# Altium PCB PC-104 16 bit bus.PCBDOC
Units mm, origin at the board's own origin, x right, y up, seen from the top; angles counter-clockwise.
Board outline 59.94 x 81.53 mm, 2 copper layers (TopLayer, BottomLayer); 58 components, 152 nets, 434 pads, 55 vias.
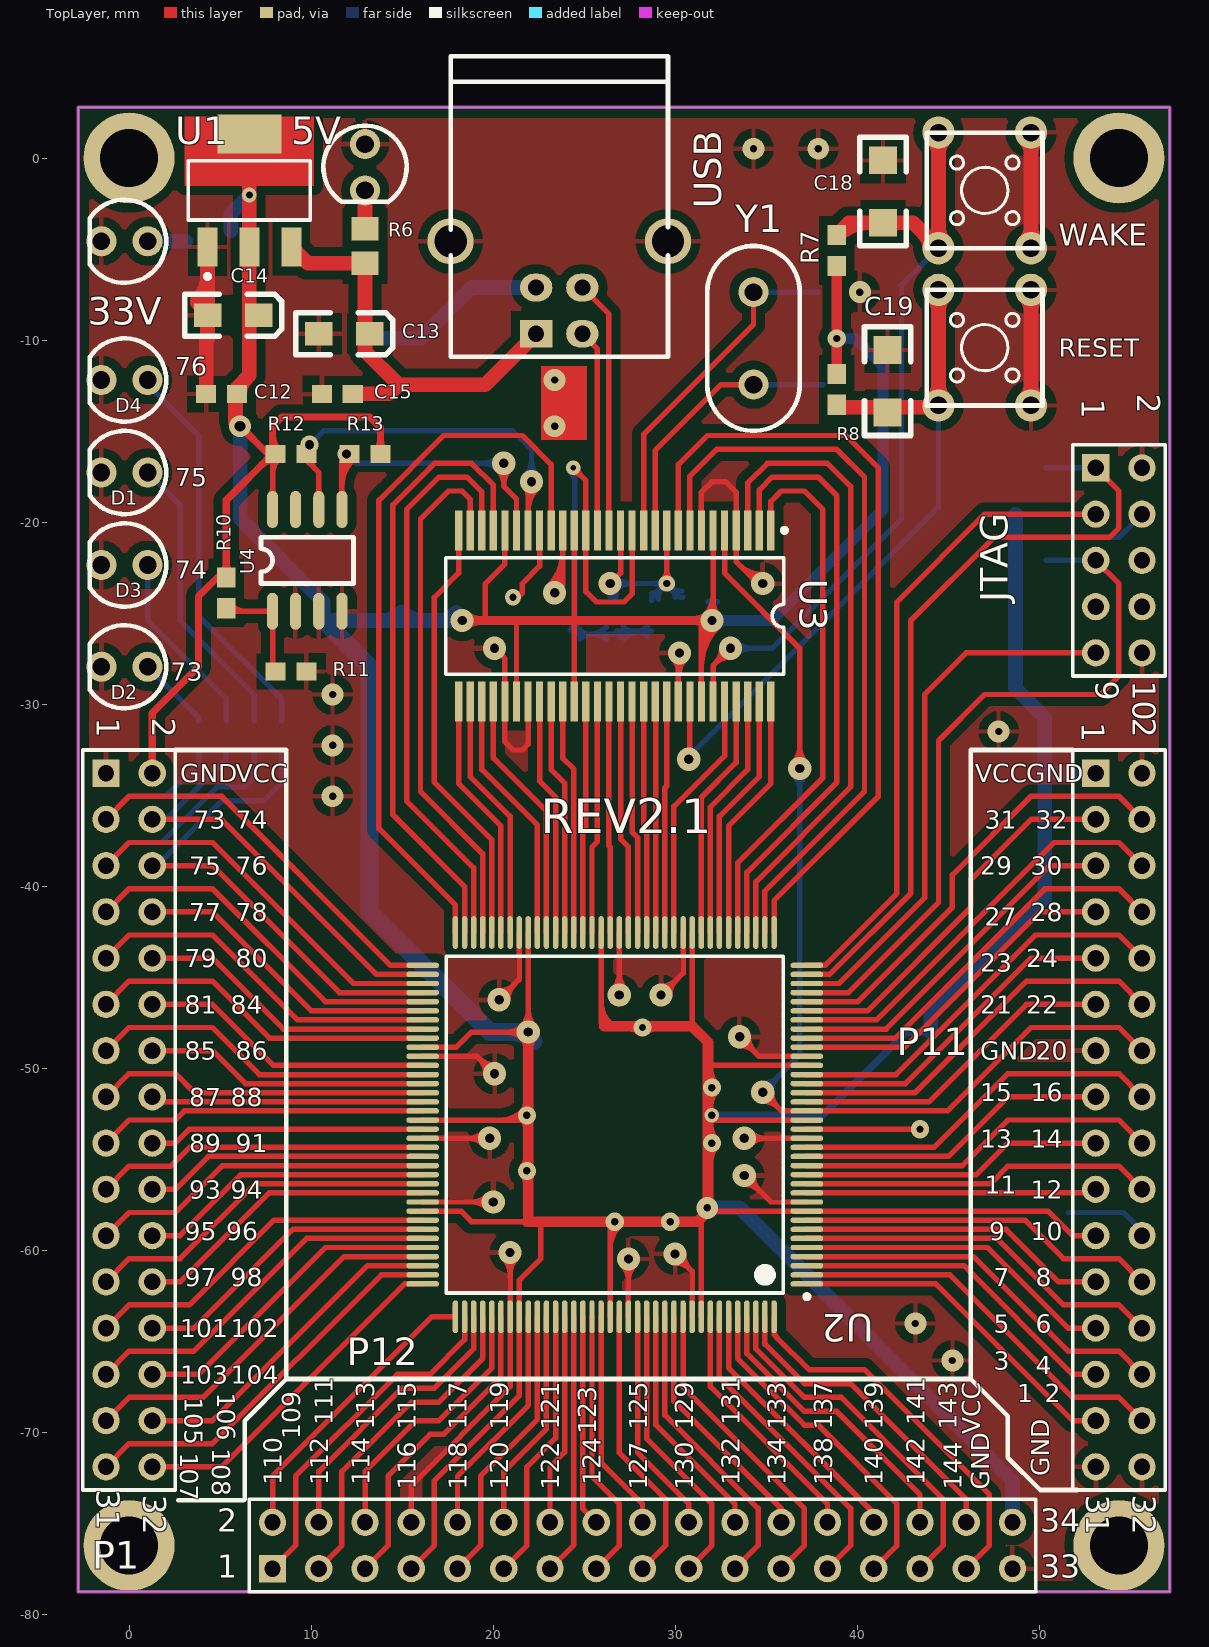
[diagram p0: TopLayer view]
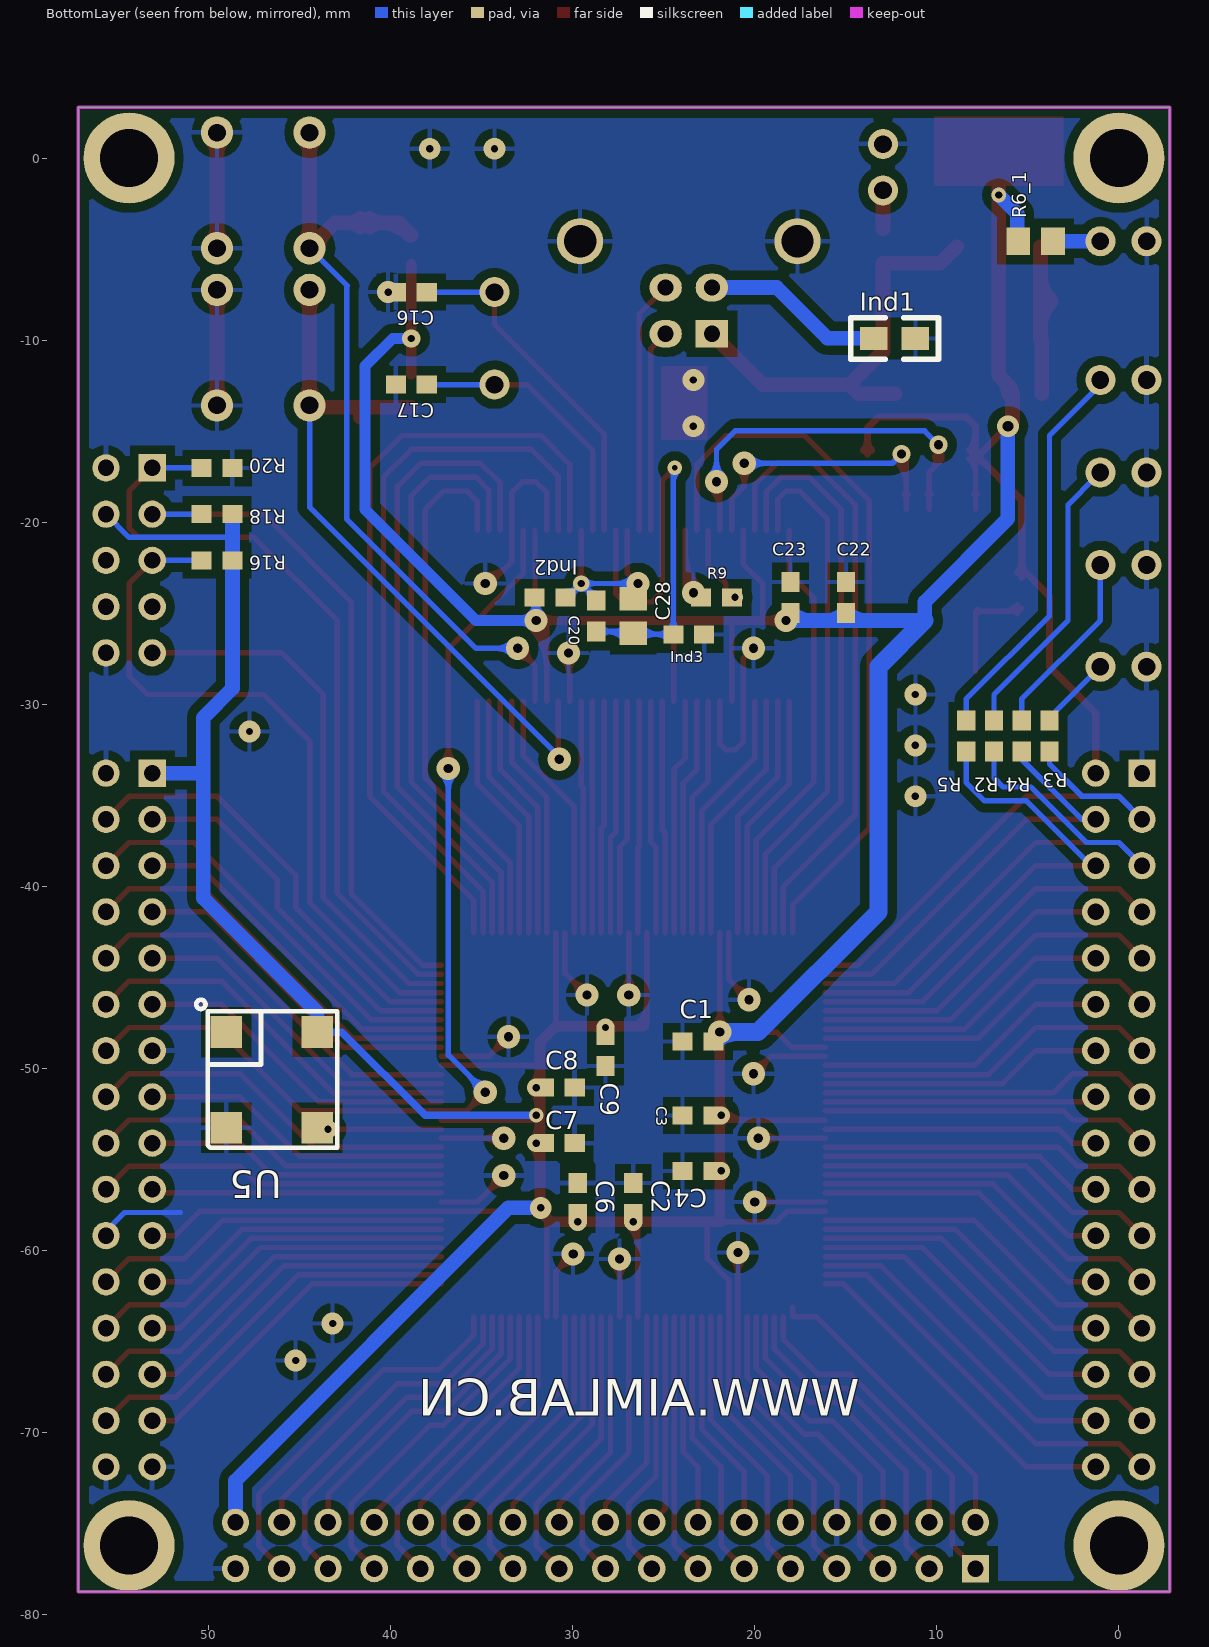
[diagram p1: BottomLayer view, seen from below]

## Layer stack, top to bottom
TopLayer: signal copper 0.0356
Dielectric: core 0.32, FR-4, Dk 4.8
BottomLayer: signal copper 0.0356

## Board outline
-2.794,-78.74 57.15,-78.74 57.15,2.794 -2.794,2.794

## Design rules (kind name [scope] priority, off if disabled: settings)
Clearance [All] p1: gap=0.2
ComponentClearance [All] p1: gap=0.254 collisioncheckmode=0 verticalgap=0.254
PlaneClearance [All] p1: clearance=0
PolygonConnect [All] p1: connectstyle=Relief reliefconductorwidth=0.254 reliefentries=4 polygonreliefangle="90 Angle"
RoutingVias [All] p1: holewidth=0.508 width=1.27 viastyle="Through Hole" minholewidth=0.711 minwidth=1.27 maxholewidth=4.711 maxwidth=7.27
SolderMaskExpansion [All] p1: expansion=0.102
TestPointUsage [All] p1: valid=0 allowmultiple=FALSE
Testpoint [All] p1: side=7 testpointundercomponent=TRUE minsize=1.016 maxsize=2.54 preferedsize=1.524 minholesize=0.508 maxholesize=1.016 preferedholesize=0.813 testpointgrid=0.025 style=1001 order=0-112345678
Width [All] p1: maxlimit=2.254 minlimit=0.2 preferedwidth=0.6
17 further rules are at their usual default settings.

## Components (designator, comment, footprint, x,y, rotation, side; value= is the part's Value field where it differs from the comment)
5V "LED" LED-3 12.954,0.762 r270 top (schematic designator D5)
33V "LED" LED-3 1.016,-4.572 r180 top (schematic designator D5)
C1 "0.1uF" 1608[0603] 23.114,-48.514 r180 bottom
C2 "0.1uF" 1608[0603] 26.67,-57.15 r270 bottom
C3 "Cap Semi" 1608[0603] 23.114,-52.578 r180 bottom
C4 "Cap Semi" 1608[0603] 23.114,-55.626 r180 bottom
C6 "Cap Semi" 1608[0603] 29.718,-57.15 r270 bottom
C7 "Cap Semi" 1608[0603] 30.734,-54.102 r0 bottom
C8 "Cap Semi" 1608[0603] 30.734,-51.054 r0 bottom
C9 "Cap Semi" 1608[0603] 28.194,-49.022 r90 bottom
C12 "0.1uF" 1608[0603] 5.08,-12.954 r180 top
C13 "22uF" 3216 13.208,-9.652 r0 top
C14 "22uF" 3216 7.112,-8.636 r0 top
C15 "0.1uF" 1608[0603] 11.43,-12.954 r180 top
C16 "Cap" 1608[0603] 38.862,-7.366 r0 bottom
C17 "Cap" 1608[0603] 38.862,-12.446 r0 bottom
C18 "0.1uF" 1206 41.402,-3.556 r90 top
C19 "0.1uF" 1206 41.656,-13.97 r90 top
C20 "0.1uF" 1608[0603] 28.702,-25.146 r270 bottom
C22 "Cap Semi" 1608[0603] 14.986,-24.13 r270 bottom
C23 "Cap Semi" 1608[0603] 18.034,-24.13 r270 bottom
C28 "10uF" 6-0805 26.67,-25.146 r270 bottom
D1 "LED" LED-3 1.016,-17.272 r180 top
D2 "LED" LED-3 1.016,-27.94 r180 top
D3 "LED" LED-3 1.016,-22.352 r180 top
D4 "LED" LED-3 1.016,-12.192 r180 top
Ind1 "10uh" 0805 13.462,-9.906 r180 bottom
Ind2 "10uH" 1608[0603] 31.242,-24.13 r180 bottom
Ind3 "10uH" 1608[0603] 23.622,-26.162 r0 bottom
JTAG "JTAG" HDR2X5 53.086,-17.018 r270 top (schematic designator P3)
P1 "Header 9X2" HDR2X16 -1.27,-33.782 r270 top
P11 "Header 6X2" HDR2X16 53.086,-33.782 r270 top
P12 "Header 6X2" HDR2X17 7.874,-77.47 r0 top (schematic designator P11)
R2 "Res1" 1608[0603] 6.858,-31.75 r270 bottom
R3 "Res1" 1608[0603] 3.81,-31.75 r270 bottom
R4 "Res1" 1608[0603] 5.334,-31.75 r270 bottom
R5 "Res1" 1608[0603] 8.382,-31.75 r270 bottom
R6 "4.7K" 2012[0805] 12.954,-4.826 r270 top
R6_1 "4.7K" 2012[0805] 4.572,-4.572 r180 bottom (schematic designator R6)
R7 "100K" 1608[0603] 38.862,-5.08 r270 top
R8 "100K" 1608[0603] 38.862,-12.7 r90 top
R9 "Res3" 1608[0603] 22.098,-24.13 r0 bottom
R10 "0" 1608[0603] 5.334,-23.876 r90 top
R11 "0" 1608[0603] 8.89,-28.194 r0 top
R12 "2K2" 1608[0603] 8.89,-16.256 r0 top
R13 "2K2" 1608[0603] 12.954,-16.256 r180 top
R16 "10K" 1608[0603] 49.53,-22.098 r180 bottom
R18 "10K" 1608[0603] 49.53,-19.558 r180 bottom
R20 "10k" 1608[0603] 49.53,-17.018 r0 bottom
RESET "SW-PB" SW-6-6 46.99,-10.414 r180 top (schematic designator S2)
U1 "ASM1117-3.3" SOT223 6.604,-1.778 r0 top
U2 "EPM1270T144C5N" TQFP144_N 26.67,-53.086 r180 top locked
U3 "CY7C68013A-56PVXC" O56 26.67,-25.146 r180 top locked
U4 "24LC64" SO-8 7.874,-24.892 r90 top
U5 "50MHZ" OSC_50MHZ 49.022,-48.006 r270 bottom
USB "USB_B" USB-SQUARE 22.352,-9.652 r90 top (schematic designator USB1)
WAKE "SW-PB" SW-6-6 46.99,-1.778 r180 top (schematic designator S1)
Y1 "24MHZ" XTAL 34.29,-9.906 r270 top

## Footprints (in the part's own frame and the unit in brackets; to place one, negate y for a bottom-side part, rotate by r counter-clockwise, add the part's x,y. Pads: shape width x height; smd on the part's side, far side on the other; paste and mask are expansions set on the pad)
6-0805 [mm] "Chip Resistor; Body 2.0 x 1.3 mm (LxW typ)"
  rect 1.3x1.5 smd: 1(-0.95,0) 2(0.95,0)
0805 [mil]
  rect 60x50 smd: 1(0,0) 2(90,0)
  silkscreen extent -50,-45 140,45
1206 [mil]
  rect 60x60 smd: 1(0,0) 2(135,0)
  silkscreen extent -50,-50 185,50
1608[0603] [mm] "Chip Capacitor; Body 1.6 x 0.8 mm (LxW typ)"
  rect 1.1x1 smd: 1(-0.85,0) 2(0.85,0)
2012[0805] [mm] "Chip Resistor; Body 2.0 x 1.3 mm (LxW typ)"
  rect 1.3x1.5 smd: 1(-0.95,0) 2(0.95,0)
3216 [mil]
  rect 60x50 smd: 1(0,0) 2(-110,0)
  silkscreen extent -160,-45 50,45
HDR2X5 [mm] "Connector; Header; 5x2 Position"
  rect 1.5x1.5 hole 0.9: 1(0,0)
  round 1.5 hole 0.9: 2(0,2.54) 3(2.54,0) 4(2.54,2.54) 5(5.08,0) 6(5.08,2.54) 7(7.62,0) 8(7.62,2.54) 9(10.16,0) 10(10.16,2.54)
  silkscreen extent -1.27,-1.27 11.43,3.81
HDR2X16 [mm] "Connector; Header; 16x2 Position"
  rect 1.5x1.5 hole 0.9: 1(0,0)
  round 1.5 hole 0.9: 2(0,2.54) 3(2.54,0) 4(2.54,2.54) 5(5.08,0) 6(5.08,2.54) 7(7.62,0) 8(7.62,2.54) 9(10.16,0) 10(10.16,2.54) 11(12.7,0) 12(12.7,2.54) 13(15.24,0) 14(15.24,2.54) 15(17.78,0) 16(17.78,2.54) 17(20.32,0) 18(20.32,2.54) 19(22.86,0) 20(22.86,2.54) 21(25.4,0) 22(25.4,2.54) 23(27.94,0) 24(27.94,2.54) 25(30.48,0) 26(30.48,2.54) 27(33.02,0) 28(33.02,2.54) 29(35.56,0) 30(35.56,2.54) 31(38.1,0) 32(38.1,2.54)
  silkscreen extent -1.27,-1.27 39.37,3.81
HDR2X17 [mm] "Connector; Header; 17x2 Position"
  rect 1.5x1.5 hole 0.9: 1(0,0)
  round 1.5 hole 0.9: 2(0,2.54) 3(2.54,0) 4(2.54,2.54) 5(5.08,0) 6(5.08,2.54) 7(7.62,0) 8(7.62,2.54) 9(10.16,0) 10(10.16,2.54) 11(12.7,0) 12(12.7,2.54) 13(15.24,0) 14(15.24,2.54) 15(17.78,0) 16(17.78,2.54) 17(20.32,0) 18(20.32,2.54) 19(22.86,0) 20(22.86,2.54) 21(25.4,0) 22(25.4,2.54) 23(27.94,0) 24(27.94,2.54) 25(30.48,0) 26(30.48,2.54) 27(33.02,0) 28(33.02,2.54) 29(35.56,0) 30(35.56,2.54) 31(38.1,0) 32(38.1,2.54) 33(40.64,0) 34(40.64,2.54)
  silkscreen extent -1.27,-1.27 41.91,3.81
LED-3 [mil]
  round 65 hole 38: 1(0,0) 2(100,0)
  silkscreen extent -40,-90 125,90
O56 [mm] "SSOP; 56 Leads; Body Width 7.5 mm; Pitch 0.635 mm"
  rect 0.4x2.2 smd: 1(-8.572,-4.7) 2(-7.938,-4.7) 3(-7.302,-4.7) 4(-6.667,-4.7) 5(-6.032,-4.7) 6(-5.397,-4.7) 7(-4.762,-4.7) 8(-4.127,-4.7) 9(-3.492,-4.7) 10(-2.857,-4.7) 11(-2.222,-4.7) 12(-1.587,-4.7) 13(-0.952,-4.7) 14(-0.317,-4.7) 15(0.318,-4.7) 16(0.953,-4.7) 17(1.588,-4.7) 18(2.223,-4.7) 19(2.858,-4.7) 20(3.493,-4.7) 21(4.128,-4.7) 22(4.763,-4.7) 23(5.398,-4.7) 24(6.033,-4.7) 25(6.667,-4.7) 26(7.302,-4.7) 27(7.938,-4.7) 28(8.572,-4.7) 29(8.572,4.7) 30(7.938,4.7) 31(7.302,4.7) 32(6.667,4.7) 33(6.032,4.7) 34(5.397,4.7) 35(4.762,4.7) 36(4.127,4.7) 37(3.492,4.7) 38(2.857,4.7) 39(2.222,4.7) 40(1.587,4.7) 41(0.952,4.7) 42(0.317,4.7) 43(-0.318,4.7) 44(-0.953,4.7) 45(-1.588,4.7) 46(-2.223,4.7) 47(-2.858,4.7) 48(-3.493,4.7) 49(-4.128,4.7) 50(-4.763,4.7) 51(-5.398,4.7) 52(-6.033,4.7) 53(-6.667,4.7) 54(-7.302,4.7) 55(-7.938,4.7) 56(-8.572,4.7)
  silkscreen extent -9.45,-4.82 9.28,3.2
OSC_50MHZ [mm] "OSC_50MHZ"
  rect 1.75x1.75 smd: 1(0,0) 2(5.25,0) 3(5.25,5) 4(0,5)
  silkscreen extent -1.78,-1.65 6.35,6.1
SO-8 [mil]
  oval 80x24 smd: 1(0,0) 2(0,-50) 3(0,-100) 4(0,-150) 5(220,-150) 6(220,-100) 7(220,-50) 8(220,0)
  silkscreen extent 60,-175 160,25
SOT223 [mm] "SOT-223/SC-73; 4 Leads; Body 6.7 x 7.3 mm, inc. leads (LxW max)"
  rect 1.1x2.15 smd: 1(-2.3,-3.1) 2(0,-3.1) 3(2.3,-3.1)
  rect 3.5x2.15 smd: 4(0,3.1)
  silkscreen extent -3.35,-4.85 3.35,1.62
SW-6-6 [mil]
  round 70 hole 38: 1(-100,125) 1(-100,-125) 2(100,125) 2(100,-125)
  silkscreen extent -125,-125 125,125
TQFP144_N [mm] "Thin QFP, 144-Leads, Body 20x20mm, Pitch 0.5mm, IPC Medium Density"
  oval 1.8x0.3 smd: 1(-10.55,8.75) 2(-10.55,8.25) 3(-10.55,7.75) 4(-10.55,7.25) 5(-10.55,6.75) 6(-10.55,6.25) 7(-10.55,5.75) 8(-10.55,5.25) 9(-10.55,4.75) 10(-10.55,4.25) 11(-10.55,3.75) 12(-10.55,3.25) 13(-10.55,2.75) 14(-10.55,2.25) 15(-10.55,1.75) 16(-10.55,1.25) 17(-10.55,0.75) 18(-10.55,0.25) 19(-10.55,-0.25) 20(-10.55,-0.75) 21(-10.55,-1.25) 22(-10.55,-1.75) 23(-10.55,-2.25) 24(-10.55,-2.75) 25(-10.55,-3.25) 26(-10.55,-3.75) 27(-10.55,-4.25) 28(-10.55,-4.75) 29(-10.55,-5.25) 30(-10.55,-5.75) 31(-10.55,-6.25) 32(-10.55,-6.75) 33(-10.55,-7.25) 34(-10.55,-7.75) 35(-10.55,-8.25) 36(-10.55,-8.75) 73(10.55,-8.75) 74(10.55,-8.25) 75(10.55,-7.75) 76(10.55,-7.25) 77(10.55,-6.75) 78(10.55,-6.25) 79(10.55,-5.75) 80(10.55,-5.25) 81(10.55,-4.75) 82(10.55,-4.25) 83(10.55,-3.75) 84(10.55,-3.25) 85(10.55,-2.75) 86(10.55,-2.25) 87(10.55,-1.75) 88(10.55,-1.25) 89(10.55,-0.75) 90(10.55,-0.25) 91(10.55,0.25) 92(10.55,0.75) 93(10.55,1.25) 94(10.55,1.75) 95(10.55,2.25) 96(10.55,2.75) 97(10.55,3.25) 98(10.55,3.75) 99(10.55,4.25) 100(10.55,4.75) 101(10.55,5.25) 102(10.55,5.75) 103(10.55,6.25) 104(10.55,6.75) 105(10.55,7.25) 106(10.55,7.75) 107(10.55,8.25) 108(10.55,8.75)
  oval 0.3x1.8 smd: 37(-8.75,-10.55) 38(-8.25,-10.55) 39(-7.75,-10.55) 40(-7.25,-10.55) 41(-6.75,-10.55) 42(-6.25,-10.55) 43(-5.75,-10.55) 44(-5.25,-10.55) 45(-4.75,-10.55) 46(-4.25,-10.55) 47(-3.75,-10.55) 48(-3.25,-10.55) 49(-2.75,-10.55) 50(-2.25,-10.55) 51(-1.75,-10.55) 52(-1.25,-10.55) 53(-0.75,-10.55) 54(-0.25,-10.55) 55(0.25,-10.55) 56(0.75,-10.55) 57(1.25,-10.55) 58(1.75,-10.55) 59(2.25,-10.55) 60(2.75,-10.55) 61(3.25,-10.55) 62(3.75,-10.55) 63(4.25,-10.55) 64(4.75,-10.55) 65(5.25,-10.55) 66(5.75,-10.55) 67(6.25,-10.55) 68(6.75,-10.55) 69(7.25,-10.55) 70(7.75,-10.55) 71(8.25,-10.55) 72(8.75,-10.55) 109(8.75,10.55) 110(8.25,10.55) 111(7.75,10.55) 112(7.25,10.55) 113(6.75,10.55) 114(6.25,10.55) 115(5.75,10.55) 116(5.25,10.55) 117(4.75,10.55) 118(4.25,10.55) 119(3.75,10.55) 120(3.25,10.55) 121(2.75,10.55) 122(2.25,10.55) 123(1.75,10.55) 124(1.25,10.55) 125(0.75,10.55) 126(0.25,10.55) 127(-0.25,10.55) 128(-0.75,10.55) 129(-1.25,10.55) 130(-1.75,10.55) 131(-2.25,10.55) 132(-2.75,10.55) 133(-3.25,10.55) 134(-3.75,10.55) 135(-4.25,10.55) 136(-4.75,10.55) 137(-5.25,10.55) 138(-5.75,10.55) 139(-6.25,10.55) 140(-6.75,10.55) 141(-7.25,10.55) 142(-7.75,10.55) 143(-8.25,10.55) 144(-8.75,10.55)
  silkscreen extent -10.68,-9.25 9.25,9.57, body extent -10,-10 10,10, height 1.6
USB-SQUARE [mil]
  round 100 hole 70: 0(200,185) 0(200,-285)
  rect 60x70 hole 35: 1(0,0)
  oval 60x70 hole 35: 2(0,-100) 3(100,-100) 4(100,0)
  silkscreen extent -50,-285 600,185
XTAL [mil]
  round 65 hole 38: 1(-100,0) 2(100,0)
  silkscreen extent -200,-100 200,100

## Part data
5V 33V D1 D2 D3 D4: library part LED3, "Typical BLUE SiC LED"
C1 C2: library part "Cap Semi", "Capacitor (Semiconductor SIM Model)"
C3 C4 C6 C7 C8 C9 C22 C23: "Capacitor (Semiconductor SIM Model)"
C12 C15 C20: library part CAP, "Capacitor"
C13 C14 C28: library part ELECTRO1, "Electrolytic Capacitor"
C16 C17: "Capacitor"
C18 C19: library part Cap2, "Capacitor"
Ind1 Ind2 Ind3: library part RES1
JTAG: library part "Header 5X2", "Header, 5-Pin, Dual row"
P1: library part "Header 13X2H", "Header, 13-Pin, Dual row, Right Angle"
P11 P12: "Header, 6-Pin, Dual row"
R2 R3 R4 R5 R9: "Resistor"
R6 R6_1 R12 R13: library part RES2
R7 R8: library part Res1, "Resistor"
R10 R11 R16 R18 R20: library part Res2, "Resistor"
RESET WAKE: "Switch"
U1: library part LM317MAT(3), "Three-Terminal Adjustable Output Positive Voltage Regulator"
U2: "MAX II 3.3/2.5V CPLD, 116 IOs, 1,270 Logic Elements, 144-Pin Plastic TQFP, Commercial Temperature, Speed Grade 5, Pb-Free"
U3: "EZ-USB FX2LP USB Microcontroller Ideal for Non-Battery Powered Applications,16K RAM, 24 I/Os, 56-Pin SSOP, Pb-Free, Commercial Grade"
U4: library part 24LC00
U5: library part OSC50MHZ
Y1: library part XTAL, "Crystal Oscillator"

## Free pads (board coordinates)
  round 5 hole 3.175: 1(0,-76.2) 2(54.356,0) 3(54.356,-76.2) 4(0,0)

## Via types
v1: diameter 1.27, hole 0.508, TopLayer to BottomLayer, 26 vias
v2: diameter 1.2, hole 0.4, TopLayer to BottomLayer, tented both sides, 12 vias
v3: diameter 1, hole 0.4, TopLayer to BottomLayer, 8 vias
v4: diameter 0.8, hole 0.4, TopLayer to BottomLayer, tented both sides, 2 vias
v5: diameter 0.9, hole 0.4, TopLayer to BottomLayer, 2 vias
v6: diameter 1, hole 0.5, TopLayer to BottomLayer, 2 vias
v7: diameter 1, hole 0.4, TopLayer to BottomLayer, tented both sides, 1 vias
v8: diameter 1.2, hole 0.6, TopLayer to BottomLayer, tented both sides, 1 vias
v9: diameter 0.8, hole 0.3, TopLayer to BottomLayer, 1 vias

## Nets (pads, with @x,y where several pads share a name; then routed paths per layer and width w, separated by ;. In a path a pad name is that pad's centre, name@x,y a point inside that pad or via, vN(x,y) a via of type N, cw(c..) or ccw(c..) an arc to the next point about the centre after c; other vN are vias at no path point)
+5V: 
AEN: P1.32 U2.108 | length 19
  TopLayer w0.3: P1.32 5.08,-71.882 15.126,-61.836 U2.108
AUSBGND: C20.2 C28.2 Ind3.2 U3.13 U3.17 | length 37.2
  TopLayer w0.3: v9@24.384,-17.268 cw(c24.384,-17.872) 24.811,-17.445 cw(c25.238,-17.018) v9@24.634,-17.018 ; v9@24.472,-17.018 v9(24.384,-17.018) 25.082,-17.716 U3.17 25.082,-23.812 25.654,-24.384 27.178,-24.384 27.622,-23.939 U3.13
  BottomLayer w0.3: v9@24.207,-17.195 cw(c23.568,-17.834) 24.472,-17.834 ; Ind3.2@24.224,-25.915 ccw(c23.627,-25.317) 24.472,-25.317 ccw(c25.317,-25.317) Ind3.2@24.719,-25.915 ; 24.472,-17.409 cw(c24.775,-17.409) v9@24.561,-17.195 ; v9@24.472,-17.018 Ind3.2 26.604,-26.162 C28.2 ; Ind3.2@24.769,-26.409 cw(c25.367,-27.007) 25.367,-26.162 cw(c25.367,-25.317) Ind3.2@24.769,-25.915 ; 25.204,-26.162 ccw(c25.204,-24.73) C28.2@26.216,-25.742 ; 25.522,-26.162 cw(c25.522,-27.144) C28.2@26.216,-26.45 ; C28.2@26.77,-25.996 C20.2 ; C28.2@26.911,-26.237 cw(c27.494,-26.82) 27.494,-25.996 ; C28.2@27.124,-26.45 cw(c28.219,-27.545) C20.2@28.219,-25.996 ; C28.2@27.124,-25.742 ccw(c27.736,-25.13) 27.736,-25.996 ; C20.2@28.455,-26.243 ccw(c27.857,-26.841) 27.857,-25.996 ccw(c27.857,-25.151) C20.2@28.455,-25.748
AVCC3.3: C20.1 C28.1 Ind2.2 U3.10 U3.14 | length 23.8
  TopLayer w0.3: v1(26.416,-23.368) 26.987,-22.796 U3.14 ; v5@29.315,-23.156 ccw(c28.803,-22.644) 29.527,-22.644 ccw(c30.252,-22.644) v5@29.74,-23.156 ; v5(29.527,-23.368) U3.10
  BottomLayer w0.3: v1@26.333,-23.285 cw(c25.892,-23.727) C28.1@26.405,-24.082 ; C28.1@26.34,-23.847 cw(c26.278,-24.234) C28.1@26.67,-24.234 ; v1@26.588,-23.54 cw(c26.192,-23.935) C28.1@26.652,-24.253 ; C28.1 26.67,-23.622 v1(26.416,-23.368) v5@29.464,-23.368 ; C28.1@26.759,-23.711 cw(c27.587,-24.539) 27.587,-23.368 cw(c27.587,-22.197) v1@26.759,-23.025 ; C20.1 28.702,-24.13 v5@29.464,-23.368 ; C20.1@28.702,-23.896 ccw(c28.702,-23.331) 29.101,-23.731 ; C20.1@28.907,-23.925 cw(c29.527,-24.546) 29.527,-23.668 cw(c29.527,-24.239) Ind2.2@29.931,-23.835 ; C20.1@29.052,-24.246 cw(c30.177,-24.246) v5@29.382,-23.45 ; C20.1@29.06,-23.772 ccw(c28.657,-23.368) v5@29.228,-23.368 ; v5@29.315,-23.58 ccw(c28.803,-24.092) 28.803,-23.368 ccw(c28.803,-22.644) v5@29.315,-23.156 ; v5@29.546,-23.45 ccw(c30.342,-22.655) Ind2.2@30.342,-23.78 ; 29.827,-23.731 cw(c29.427,-24.13) Ind2.2@29.992,-24.13 ; v5@29.827,-23.368 ccw(c30.705,-23.368) Ind2.2@30.085,-23.989 ; Ind2.2 30.226,-24.13 v5@29.464,-23.368
BALE: 
BCLK: P1.17 U2.89 | length 18.1
  TopLayer w0.3: P1.17 0,-52.832 2.54,-52.832 3.036,-52.336 U2.89
BUS_IOR: P12.10 U2.117 | length 12.9
  TopLayer w0.3: P12.10 18.034,-72.39 21.92,-68.504 U2.117
BUS_IOW: P12.6 U2.113 | length 14.9
  TopLayer w0.3: P12.6 12.954,-72.136 15.748,-69.342 17.018,-69.342 19.92,-66.44 U2.113
BUS_OSC: P1.18 U2.91 | length 15.2
  TopLayer w0.3: P1.18 2.54,-54.102 3.306,-53.336 U2.91
BUS_RESET: P1.21 U2.95 | length 19
  TopLayer w0.3: P1.21 0,-57.912 2.54,-57.912 5.116,-55.336 U2.95
CLK_OUT: P11.14 U2.20 U3.5 | length 64.4
  TopLayer w0.3: U3.5 32.703,-22.796 36.83,-26.924 v1(36.83,-33.528) ; v1@34.798,-51.793 cw(c34.798,-52.964) 35.626,-52.136 cw(c36.454,-51.308) v1@35.283,-51.308 ; v1(34.798,-51.308) 35.826,-52.336 44.946,-52.336 49.53,-47.752 54.356,-47.752 P11.14 ; v1@36.487,-33.185 ccw(c35.659,-32.357) 36.83,-32.357 ccw(c38.001,-32.357) v1@37.173,-33.185
  BottomLayer w0.3: v1(34.798,-51.308) 36.83,-49.276 v1(36.83,-33.528) ; v1@34.798,-50.823 ccw(c34.798,-49.652) 35.626,-50.48 ccw(c36.454,-51.308) v1@35.283,-51.308 ; v1@36.487,-33.871 cw(c35.659,-34.699) 36.83,-34.699 cw(c38.001,-34.699) v1@37.173,-33.871
CPLD_CLK: U2.18 U5.3 | length 6.2
  TopLayer w0.3: U2.18 v7@43.434,-53.336
  other v7: 43.434,-53.34
CTL0: U2.61 U3.36 | length 13.1
  TopLayer w0.3: U3.36 22.543,-34.227 23.42,-35.104 U2.61
CTL1: U2.60 U3.37 | length 13
  TopLayer w0.3: U3.37 23.177,-33.591 23.92,-34.334 U2.60
CTL2: U2.59 U3.38 | length 12.9
  TopLayer w0.3: U3.38 23.812,-32.956 24.42,-33.564 U2.59
DGND: 5V.1 33V.2 C1.1 C2.1 C3.1 C4.1 C6.1 C7.1 C8.1 C9.1 C12.2 C13.2 C14.2 C15.2 C16.2 C17.2 C18.2 C19.2 C22.1 C23.1 D1.2 D2.2 D3.2 D4.2 Ind1.2 Ind3.1 JTAG.2 JTAG.10 P1.1 P11.2 P11.13 P11.22 P11.31 P11.32 P12.8 P12.33 R9.2 R11.2 R20.1 RESET.1 U1.1 U2.10 U2.17 U2.26 U2.47 U2.54 U2.65 U2.83 U2.92 U2.99 U2.115 U2.128 U2.135 U3.4 U3.7 U3.19 U3.33 U3.35 U3.48 U4.2 U4.3 U4.4 U5.2 USB.0 WAKE.1 | length 152.2
  TopLayer w0.3: P12.8 15.494,-72.898 20.92,-67.472 v1(20.92,-60.106) ; U2.99 v1(19.998,-57.336) ; U2.92 v1(19.8,-53.836) ; U2.83 19.11,-49.336 v1(20.066,-50.292) ; v1@19.457,-54.179 ccw(c18.629,-55.007) 18.629,-53.836 ccw(c18.629,-52.665) v1@19.457,-53.493 ; v1@19.581,-50.292 ccw(c18.41,-50.292) 19.238,-49.464 ccw(c20.066,-48.636) v1@20.066,-49.807 ; v1@19.655,-57.679 ccw(c18.827,-58.507) 18.827,-57.336 ccw(c18.827,-56.165) v1@19.655,-56.993 ; v1(20.066,-26.924) 20.637,-27.495 20.637,-32.067 21.082,-32.512 21.59,-32.512 21.907,-32.194 U3.35 ; v1(20.32,-46.228) 21.42,-45.128 U2.65 ; v1@20.32,-45.743 ccw(c20.32,-44.572) 21.148,-45.4 ccw(c21.976,-46.228) v1@20.805,-46.228 ; v1@20.577,-60.449 cw(c19.749,-61.277) 20.92,-61.277 cw(c22.091,-61.277) v1@21.263,-60.449 ; v1@23.025,-23.533 ccw(c21.124,-21.632) 23.812,-21.632 ; v1@23.237,-23.745 ccw(c21.848,-22.356) 23.812,-22.356 ; v1(23.368,-23.876) 23.812,-23.431 U3.19 ; v1@23.449,-23.957 ccw(c22.573,-23.081) 23.812,-23.081 ; v1@26.577,-45.631 ccw(c25.749,-44.803) 26.92,-44.803 ccw(c28.091,-44.803) v1@27.263,-45.631 ; v1(26.92,-45.974) U2.54 ; v1@27.077,-60.807 cw(c26.249,-61.635) 27.42,-61.635 cw(c28.591,-61.635) v1@27.763,-60.807 ; U2.128 v1(27.42,-60.464) ; v1(29.21,-45.974) 30.42,-44.764 U2.47 ; v1@29.21,-45.489 ccw(c29.21,-44.318) 30.038,-45.146 ccw(c30.866,-45.974) v1@29.695,-45.974 ; v1@29.883,-27.521 cw(c29.208,-28.196) 30.162,-28.196 ; v1@29.972,-60.683 cw(c29.972,-61.854) 30.8,-61.026 cw(c31.628,-60.198) v1@30.457,-60.198 ; v1(29.972,-60.198) 30.92,-61.146 U2.135 ; U3.48 30.162,-27.241 v1(30.226,-27.178) ; 30.162,-28.502 cw(c31.55,-28.502) v1@30.569,-27.521 ; U3.7 31.432,-18.351 32.004,-17.78 32.766,-17.78 33.337,-18.351 33.337,-22.162 34.544,-23.368 v1(34.798,-23.368) ; v1@33.528,-48.745 cw(c33.528,-49.916) 34.356,-49.088 cw(c35.184,-48.26) v1@34.013,-48.26 ; v1(33.528,-48.26) 34.604,-49.336 U2.26 ; 33.536,-22.36 ccw(c34.798,-21.099) v1@34.798,-22.883 ; v1@33.782,-56.365 cw(c33.782,-57.536) 34.61,-56.708 cw(c35.438,-55.88) v1@34.267,-55.88 ; v1(33.782,-55.88) 35.238,-57.336 U2.10 ; v1(33.782,-53.836) U2.17 ; 34.049,-22.873 ccw(c34.798,-22.123) v1@34.798,-23.183 ; v1@34.125,-54.179 cw(c34.953,-55.007) 34.953,-53.836 cw(c34.953,-52.665) v1@34.125,-53.493 ; 34.15,-22.974 cw(c33.755,-23.368) v1@34.313,-23.368
  TopLayer w0.8: 3.739,-7.945 cw(c2.376,-9.308) 4.304,-9.308 ; 3.739,-7.803 ccw(c2.376,-6.44) 4.304,-6.44 ; C12.2 4.23,-9.98 4.304,-9.92 U1.1 ; RESET.1@49.184,-13.243 ccw(c48.349,-12.408) 49.53,-12.408 ccw(c50.711,-12.408) RESET.1@49.876,-13.243 ; RESET.1@49.184,-7.585 cw(c48.349,-8.42) 49.53,-8.42 cw(c50.711,-8.42) RESET.1@49.876,-7.585 ; WAKE.1@49.184,-4.607 ccw(c48.349,-3.772) 49.53,-3.772 ccw(c50.711,-3.772) WAKE.1@49.876,-4.607 ; WAKE.1@49.184,1.051 cw(c48.349,0.216) 49.53,0.216 cw(c50.711,0.216) WAKE.1@49.876,1.051 ; RESET.1@49.53,-13.589 RESET.1@49.53,-7.239 ; WAKE.1@49.53,-4.953 WAKE.1@49.53,1.397
  BottomLayer w0.3: 51.562,-57.912 54.61,-57.912 55.626,-58.928 P11.22
  other v2: 45.212,-66.04 43.18,-64.008 11.176,-35.052 11.176,-32.258 47.752,-31.496 11.176,-29.464 23.368,-14.732 23.368,-12.192 40.132,-7.366 34.29,0.508 37.846,0.508
G_TCK: JTAG.1 R20.2 U2.35 | length 42.6
  TopLayer w0.3: U2.35 38.476,-44.836 42.926,-40.386 42.926,-25.4 47.498,-20.828 53.848,-20.828 54.356,-20.32 54.356,-18.288 JTAG.1
  BottomLayer w0.3: R20.2 JTAG.1
G_TDI: JTAG.9 U2.34 | length 29.9
  TopLayer w0.3: U2.34 38.992,-45.336 43.688,-40.64 43.688,-29.464 45.974,-27.178 JTAG.9
G_TDO: JTAG.3 R18.1 U2.36 | length 38.2
  TopLayer w0.3: U2.36 38.214,-44.336 42.164,-40.386 42.164,-24.384 46.99,-19.558 JTAG.3
  BottomLayer w0.3: R18.1 JTAG.3
G_TMS: JTAG.5 R16.1 U2.33 | length 39.1
  TopLayer w0.3: U2.33 39.508,-45.836 44.45,-40.894 44.45,-32.004 46.99,-29.464 53.34,-29.464 54.356,-28.448 54.356,-23.368 JTAG.5
  BottomLayer w0.3: R16.1 JTAG.5
GND: 
IFCLK: U2.72 U3.20 | length 40.7
  TopLayer w0.3: U2.72 17.92,-41.034 13.716,-36.83 13.716,-18.796 17.272,-15.24 21.59,-15.24 23.177,-16.828 U3.20
IOCHK: P1.19 U2.93 | length 18.3
  TopLayer w0.3: P1.19 0,-55.372 2.286,-55.372 3.322,-54.336 U2.93
IOCHRDY: P1.31 U2.107 | length 21.8
  TopLayer w0.3: P1.31 0,-70.612 4.572,-70.612 13.848,-61.336 U2.107
IOCS16: P11.27 U2.3 | length 18.3
  TopLayer w0.3: U2.3 45.85,-60.836 51.816,-66.802 P11.27
IRQ3: P12.25 U2.138 | length 17.3
  TopLayer w0.3: U2.138 32.42,-66.964 39.624,-74.168 39.624,-76.2 P12.25
IRQ4: P12.23 U2.134 | length 17.1
  TopLayer w0.3: U2.134 30.42,-67.504 37.084,-74.168 37.084,-76.2 P12.23
IRQ5: P12.21 U2.132 | length 16.5
  TopLayer w0.3: U2.132 29.42,-69.044 34.544,-74.168 34.544,-76.2 P12.21
IRQ6: P12.19 U2.130 | length 15.8
  TopLayer w0.3: U2.130 28.42,-70.33 32.004,-73.914 32.004,-76.2 P12.19
IRQ7: P12.17 U2.127 | length 15.4
  TopLayer w0.3: U2.127 26.92,-71.116 29.464,-73.66 29.464,-76.2 P12.17
IRQ9: P1.24 U2.98 | length 16.9
  TopLayer w0.3: P1.24 2.794,-61.722 7.68,-56.836 U2.98
IRQ10: P11.28 U2.4 | length 21.1
  TopLayer w0.3: U2.4 46.366,-60.336 51.562,-65.532 54.356,-65.532 P11.28
LED_SEL: 
MEMCS16: P11.29 U2.1 | length 19
  TopLayer w0.3: U2.1 44.31,-61.836 51.816,-69.342 P11.29
MEMR: P11.25 U2.5 | length 17.7
  TopLayer w0.3: U2.5 47.136,-59.836 51.562,-64.262 P11.25
MEMW: P11.26 U2.6 | length 20.4
  TopLayer w0.3: U2.6 47.652,-59.336 51.308,-62.992 54.356,-62.992 P11.26
NetC16_1: C16.1 U3.12 Y1.1 | length 19.3
  TopLayer w0.3: U3.12 28.258,-15.176 34.29,-9.144 Y1.1
  BottomLayer w0.3: Y1.1@34.124,-7.366 C16.1@37.846,-7.366
NetC17_1: C17.1 U3.11 Y1.2 | length 15.1
  TopLayer w0.3: U3.11 28.892,-16.066 32.512,-12.446 Y1.2
  BottomLayer w0.3: Y1.2 C17.1@38.1,-12.446
NetD1_1: D1.1 R2.1 | length 16.2
  BottomLayer w0.3: D1.1@0.762,-17.526 1.27,-17.526 2.794,-19.05 2.794,-25.4 6.858,-29.464 R2.1
NetD2_1: D2.1 R3.1 | length 4.5
  BottomLayer w0.3: D2.1@0.762,-27.686 3.81,-30.734 R3.1
NetD3_1: D3.1 R4.1 | length 10.2
  BottomLayer w0.3: D3.1@0.762,-22.606 1.016,-22.86 1.016,-25.4 5.334,-29.718 R4.1
NetD4_1: D4.1 R5.1 | length 21.8
  BottomLayer w0.3: D4.1@0.762,-12.446 1.016,-12.446 3.81,-15.24 3.81,-25.146 8.382,-29.718 R5.1
NetD5_2: 5V.2 R6.1 | length 2.1
  TopLayer w0.8: R6.1 5V.2
NetP3_6: 
NetR9_1: R9.1 U3.21 | length 4.6
  TopLayer w0.3: v5@21.248,-24.13 21.336,-24.13 21.59,-23.876 ; v5@21.268,-23.895 ccw(c21.419,-23.705) 21.59,-23.876 ; U3.21 22.543,-22.415 21.59,-23.368 21.59,-23.876
  other v5: 21.082,-24.13
NetR10_1: R10.1 R11.1 U4.1 | length 7.8
  TopLayer w0.3: R10.1 5.5,-24.892 U4.1 R11.1@7.874,-28.194 ; R10.1@5.581,-25.023 cw(c5.899,-25.341) 5.899,-24.892 ; R10.1@5.581,-24.528 ccw(c6.459,-23.651) 6.459,-24.892 ; U4.1@7.765,-25.001 ccw(c7.5,-25.266) 7.5,-24.892 ccw(c7.5,-24.518) U4.1@7.765,-24.783
NetR14_1: 
NetR15_1: 
NetR21_1: 
NetR34_1: 
NetR35_1: 
PA0: U2.58 U3.40 | length 12.8
  TopLayer w0.3: U2.58 24.92,-37.056 25.082,-36.893 U3.40
PA1: U2.57 U3.41 | length 12.8
  TopLayer w0.3: U2.57 25.42,-37.826 25.717,-37.529 U3.41
PA2: U2.55 U3.42 | length 12.7
  TopLayer w0.3: U3.42 26.352,-37.782 26.42,-37.85 U2.55
PA3: U2.53 U3.43 | length 12.9
  TopLayer w0.3: U3.43 26.987,-37.401 27.42,-37.834 U2.53
PA4: U2.52 U3.44 | length 12.8
  TopLayer w0.3: U3.44 27.622,-37.02 27.92,-37.318 U2.52
PA5: U2.51 U3.45 | length 12.8
  TopLayer w0.3: U3.45 28.258,-36.639 28.42,-36.802 U2.51
PA6: U2.50 U3.46 | length 12.7
  TopLayer w0.3: U3.46 28.92,-29.873 U2.50
PA7: U2.49 U3.47 | length 12.7
  TopLayer w0.3: U2.49 29.42,-34.588 29.527,-34.48 U3.47
PB0: U2.71 U3.25 | length 34.6
  TopLayer w0.3: U2.71 18.42,-40.01 14.478,-36.068 14.478,-19.05 16.764,-16.764 18.796,-16.764 20.002,-17.97 U3.25
PB1: U2.70 U3.26 | length 32.1
  TopLayer w0.3: U2.70 18.92,-38.986 15.24,-35.306 15.24,-19.304 17.018,-17.526 18.542,-17.526 19.367,-18.351 U3.26
PB2: U2.69 U3.27 | length 29.4
  TopLayer w0.3: U3.27 18.732,-18.732 18.288,-18.288 17.526,-18.288 16.002,-19.812 16.002,-34.798 19.42,-38.216 U2.69
PB3: U2.68 U3.28 | length 23.9
  TopLayer w0.3: U3.28 18.098,-22.796 16.764,-24.13 16.764,-34.29 19.92,-37.446 U2.68
PB4: U2.67 U3.29 | length 13.7
  TopLayer w0.3: U3.29 18.098,-34.353 20.42,-36.676 U2.67
PB5: U2.66 U3.30 | length 13.6
  TopLayer w0.3: U3.30 18.732,-33.972 20.92,-36.16 U2.66
PB6: U2.63 U3.31 | length 14
  TopLayer w0.3: U3.31 19.367,-33.591 22.42,-36.644 U2.63
PB7: U2.62 U3.32 | length 13.9
  TopLayer w0.3: U3.32 20.002,-32.956 22.92,-35.874 U2.62
PD0: U2.48 U3.52 | length 13.8
  TopLayer w0.3: U2.48 29.92,-35.612 32.703,-32.829 U3.52
PD1: U2.45 U3.53 | length 13.5
  TopLayer w0.3: U2.45 31.42,-35.128 33.337,-33.21 U3.53
PD2: U2.44 U3.54 | length 13.5
  TopLayer w0.3: U2.44 31.92,-35.644 33.972,-33.591 U3.54
PD3: U2.43 U3.55 | length 13.6
  TopLayer w0.3: U2.43 32.42,-36.16 34.608,-33.972 U3.55
PD4: U2.42 U3.56 | length 13.7
  TopLayer w0.3: U2.42 32.92,-36.676 35.242,-34.353 U3.56
PD5: U2.41 U3.1 | length 30.3
  TopLayer w0.3: U2.41 33.42,-38.716 38.1,-34.036 38.1,-19.304 37.084,-18.288 35.814,-18.288 35.242,-18.86 U3.1
PD6: U2.40 U3.2 | length 33.2
  TopLayer w0.3: U2.40 33.92,-39.232 38.862,-34.29 38.862,-18.542 37.846,-17.526 35.306,-17.526 34.608,-18.224 U3.2
PD7: U2.39 U3.3 | length 35.9
  TopLayer w0.3: U3.3 33.972,-17.843 35.052,-16.764 38.354,-16.764 39.624,-18.034 39.624,-34.544 34.42,-39.748 U2.39
PORT1: P1.3 R3.2 U2.73 | length 28.8
  TopLayer w0.3: P1.3 0,-35.052 5.08,-35.052 14.364,-44.336 U2.73
  BottomLayer w0.3: P1.3 0,-35.052 2.032,-35.052 3.81,-33.274 R3.2
PORT2: P1.4 R4.2 U2.74 | length 24.2
  TopLayer w0.3: P1.4 5.08,-36.322 13.594,-44.836 U2.74
  BottomLayer w0.3: P1.4 2.032,-36.322 5.334,-33.02 R4.2
PORT3: P1.5 R2.2 U2.75 | length 32.7
  TopLayer w0.3: P1.5 0,-37.592 4.572,-37.592 12.316,-45.336 U2.75
  BottomLayer w0.3: P1.5 0,-37.592 1.778,-37.592 4.826,-34.544 6.35,-34.544 6.858,-34.036 R2.2
PORT4: P1.6 R5.2 U2.76 | length 28.4
  TopLayer w0.3: P1.6 4.572,-38.862 11.546,-45.836 U2.76
  BottomLayer w0.3: P1.6 1.524,-38.862 5.08,-35.306 7.366,-35.306 8.382,-34.29 R5.2
PORT5: P1.7 U2.77 | length 20.5
  TopLayer w0.3: P1.7 0,-40.132 4.572,-40.132 10.776,-46.336 U2.77
PORT6: P1.8 U2.78 | length 17.1
  TopLayer w0.3: P1.8 4.572,-41.402 10.006,-46.836 U2.78
PORT7: P1.9 U2.79 | length 19.8
  TopLayer w0.3: P1.9 0,-42.672 4.572,-42.672 9.236,-47.336 U2.79
PORT8: P1.10 U2.80 | length 16.5
  TopLayer w0.3: P1.10 4.572,-43.942 8.466,-47.836 U2.80
PORT9: P1.11 U2.81 | length 19.2
  TopLayer w0.3: P1.11 0,-45.212 4.572,-45.212 7.696,-48.336 U2.81
PORT10: P1.12 U2.84 | length 16.2
  TopLayer w0.3: P1.12 4.572,-46.482 7.926,-49.836 U2.84
PORT11: P1.13 U2.85 | length 19
  TopLayer w0.3: P1.13 0,-47.752 4.572,-47.752 7.156,-50.336 U2.85
PORT12: P1.14 U2.86 | length 15.6
  TopLayer w0.3: P1.14 4.572,-49.022 6.386,-50.836 U2.86
PORT13: P1.15 U2.87 | length 18.3
  TopLayer w0.3: P1.15 0,-50.292 2.54,-50.292 3.584,-51.336 U2.87
PORT14: P1.16 U2.88 | length 15
  TopLayer w0.3: P1.16 1.544,-51.836 U2.88
PORT15: P11.11 U2.21 | length 18.1
  TopLayer w0.3: U2.21 43.922,-51.836 49.276,-46.482 P11.11
PORT16: P11.12 U2.22 | length 21.5
  TopLayer w0.3: U2.22 43.152,-51.336 49.276,-45.212 54.356,-45.212 P11.12
PORT17: P11.9 U2.23 | length 18.7
  TopLayer w0.3: U2.23 42.636,-50.836 49.53,-43.942 P11.9
PORT18: P11.10 U2.24 | length 22.1
  TopLayer w0.3: U2.24 42.12,-50.336 49.784,-42.672 54.356,-42.672 P11.10
PORT19: P11.7 U2.27 | length 18.9
  TopLayer w0.3: U2.27 42.604,-48.836 50.038,-41.402 P11.7
PORT20: P11.8 U2.28 | length 22.3
  TopLayer w0.3: U2.28 42.088,-48.336 50.292,-40.132 54.356,-40.132 P11.8
PORT21: P11.5 U2.29 | length 19.6
  TopLayer w0.3: U2.29 41.572,-47.836 50.546,-38.862 P11.5
PORT22: P11.6 U2.30 | length 23
  TopLayer w0.3: U2.30 41.056,-47.336 50.8,-37.592 54.356,-37.592 P11.6
PORT23: P11.3 U2.31 | length 21.1
  TopLayer w0.3: U2.31 40.54,-46.836 46.228,-41.148 46.228,-39.624 49.53,-36.322 P11.3
PORT24: P11.4 U2.32 | length 24.6
  TopLayer w0.3: U2.32 40.024,-46.336 45.212,-41.148 45.212,-39.37 49.53,-35.052 54.356,-35.052 P11.4
REFRESH: P12.16 U2.123 | length 11.6
  TopLayer w0.3: U2.123 24.92,-74.196 P12.16
RESET#: C19.1 R8.1 RESET.2 U3.49 | length 44.1
  TopLayer w0.3: v1@30.797,-33.02 U3.49
  TopLayer w0.8: R8.1@38.862,-13.677 RESET.2@44.362,-13.677 ; C19.1@41.656,-14.224 C19.1 ; RESET.2@44.104,-13.243 ccw(c43.269,-12.408) 44.45,-12.408 ccw(c45.631,-12.408) RESET.2@44.796,-13.243 ; RESET.2@44.104,-7.585 cw(c43.269,-8.42) 44.45,-8.42 cw(c45.631,-8.42) RESET.2@44.796,-7.585 ; RESET.2@44.45,-13.589 RESET.2@44.45,-7.239
  BottomLayer w0.3: v1@30.67,-32.956 44.45,-19.177 RESET.2@44.45,-13.589
  other v1: 30.734,-33.02
SA0: P12.31 U2.144 | length 21.3
  TopLayer w0.3: 35.42,-64.63 U2.144 ; U2.144@35.42,-64.386 ccw(c36.009,-64.386) 35.593,-64.803 37.338,-66.548 40.386,-66.548 47.244,-73.406 47.244,-76.2 P12.31
SA1: P12.32 U2.143 | length 17.4
  TopLayer w0.3: U2.143 34.92,-65.146 37.084,-67.31 39.624,-67.31 45.974,-73.66 P12.32
SA2: P12.29 U2.142 | length 19.8
  TopLayer w0.3: U2.142 34.42,-65.408 37.084,-68.072 39.116,-68.072 44.704,-73.66 44.704,-76.2 P12.29
SA3: P12.30 U2.141 | length 16.3
  TopLayer w0.3: U2.141 33.92,-65.67 37.084,-68.834 38.862,-68.834 43.434,-73.406 P12.30
SA4: P12.27 U2.140 | length 18.4
  TopLayer w0.3: U2.140 33.42,-65.932 37.084,-69.596 37.846,-69.596 42.164,-73.914 42.164,-76.2 P12.27
SA5: P12.28 U2.139 | length 14.6
  TopLayer w0.3: U2.139 32.92,-66.448 40.894,-74.422 P12.28
SA6: P12.26 U2.137 | length 14
  TopLayer w0.3: U2.137 31.92,-67.48 38.354,-73.914 P12.26
SA7: P12.24 U2.133 | length 13.7
  TopLayer w0.3: U2.133 29.92,-68.274 35.814,-74.168 P12.24
SA8: P12.22 U2.131 | length 13.1
  TopLayer w0.3: U2.131 28.92,-69.56 33.274,-73.914 P12.22
SA9: P12.20 U2.129 | length 12.5
  TopLayer w0.3: U2.129 27.92,-71.1 30.734,-73.914 P12.20
SA10: P12.18 U2.125 | length 12.2
  TopLayer w0.3: U2.125 25.92,-71.64 28.194,-73.914 P12.18
SA11: P12.15 U2.124 | length 15
  TopLayer w0.3: U2.124 25.42,-72.41 26.924,-73.914 26.924,-76.2 P12.15
SA12: P12.13 U2.122 | length 14.4
  TopLayer w0.3: P12.13 24.42,-76.164 U2.122
SA13: P12.14 U2.121 | length 11.9
  TopLayer w0.3: P12.14@23.114,-75.184 23.114,-71.882 23.92,-71.076 U2.121
SA14: P12.11 U2.120 | length 15
  TopLayer w0.3: P12.11 21.844,-76.2 21.844,-71.882 23.42,-70.306 U2.120
SA15: P12.12 U2.119 | length 12.3
  TopLayer w0.3: P12.12 20.574,-72.136 22.92,-69.79 U2.119
SA16: P12.9 U2.118 | length 15.7
  TopLayer w0.3: P12.9 19.304,-76.2 19.304,-72.39 22.42,-69.274 U2.118
SA17: P12.5 U2.114 | length 17.4
  TopLayer w0.3: P12.5 14.224,-76.2 14.224,-72.39 16.51,-70.104 17.272,-70.104 20.42,-66.956 U2.114
SA18: P12.3 U2.112 | length 18.5
  TopLayer w0.3: P12.3 11.684,-76.2 11.684,-72.136 15.494,-68.326 17.018,-68.326 19.42,-65.924 U2.112
SA19: P12.1 U2.110 | length 19.2
  TopLayer w0.3: P12.1 9.144,-76.2 9.144,-72.39 14.732,-66.802 16.51,-66.802 18.42,-64.892 U2.110
SBHE: P11.30 U2.2 | length 21.7
  TopLayer w0.3: U2.2 45.08,-61.336 51.816,-68.072 54.356,-68.072 P11.30
SCL: R12.2 U3.22 U4.6 | length 29.1
  TopLayer w0.3: R12.2 9.74,-16.598 10.414,-17.272 U4.6 ; R12.2@9.81,-16.098 ccw(c10.264,-16.372) R12.2@9.889,-16.747 ; R12.2@9.835,-16.278 ccw(c10.229,-16.468) 9.92,-16.778 ; R12.2@10.067,-16.253 ccw(c10.602,-16.576) 10.16,-17.018 ; R12.2@10.105,-16.408 ccw(c10.631,-16.663) 10.218,-17.076 ; U4.6@10.305,-18.483 ccw(c10.04,-18.219) 10.414,-18.219 ccw(c10.788,-18.219) U4.6@10.523,-18.483 ; v1@21.755,-18.123 cw(c21.387,-18.491) 21.907,-18.491 ; U3.22 21.907,-17.97 v1(22.098,-17.78) ; U3.22@21.907,-19.411 cw(c23.729,-19.411) v1@22.441,-18.123 ; 21.907,-18.687 cw(c23.005,-18.687) v1@22.229,-17.911
  BottomLayer w0.3: v6@9.652,-16.002 10.668,-14.986 21.082,-14.986 22.098,-16.002 v1(22.098,-17.78) ; v1@21.755,-17.437 ccw(c20.927,-16.609) 22.098,-16.609 ccw(c23.269,-16.609) v1@22.441,-17.437
  other v6: 9.906,-15.748
SD0: P1.30 U2.106 | length 18.4
  TopLayer w0.3: P1.30 4.572,-69.342 13.078,-60.836 U2.106
SD1: P1.28 U2.104 | length 17.7
  TopLayer w0.3: P1.28 3.81,-66.802 10.776,-59.836 U2.104
SD2: P1.27 U2.103 | length 20.5
  TopLayer w0.3: P1.27 0,-65.532 3.556,-65.532 9.752,-59.336 U2.103
SD3: P1.26 U2.102 | length 17.1
  TopLayer w0.3: P1.26 3.556,-64.262 8.982,-58.836 U2.102
SD4: P1.25 U2.101 | length 19.8
  TopLayer w0.3: P1.25 0,-62.992 3.302,-62.992 7.958,-58.336 U2.101
SD5: P1.23 U2.97 | length 19.6
  TopLayer w0.3: P1.23 0,-60.452 2.794,-60.452 6.91,-56.336 U2.97
SD6: P1.22 U2.96 | length 16.2
  TopLayer w0.3: P1.22 2.794,-59.182 6.14,-55.836 U2.96
SD7: P1.20 U2.94 | length 15.6
  TopLayer w0.3: P1.20 2.54,-56.642 4.346,-54.836 U2.94
SD8: P11.23 U2.7 | length 17.1
  TopLayer w0.3: U2.7 48.168,-58.836 51.054,-61.722 P11.23
SD9: P11.24 U2.8 | length 19.8
  TopLayer w0.3: U2.8 49.192,-58.336 51.308,-60.452 54.356,-60.452 P11.24
SD10: P11.19 U2.11 | length 15.9
  TopLayer w0.3: U2.11 P11.19@53.086,-56.836
SD11: P11.20 U2.12 | length 19.3
  TopLayer w0.3: U2.12 47.296,-56.336 48.26,-55.372 54.356,-55.372 P11.20
SD12: P11.17 U2.13 | length 16.6
  TopLayer w0.3: U2.13 46.526,-55.836 48.26,-54.102 P11.17
SD13: P11.18 U2.14 | length 20
  TopLayer w0.3: U2.14 45.756,-55.336 48.26,-52.832 54.356,-52.832 P11.18
SD14: P11.15 U2.15 | length 17.2
  TopLayer w0.3: U2.15 44.986,-54.836 48.26,-51.562 P11.15
SD15: P11.16 U2.16 | length 20.6
  TopLayer w0.3: U2.16 44.216,-54.336 48.26,-50.292 54.356,-50.292 P11.16
SDA: R13.2 U3.23 U4.5 | length 25.7
  TopLayer w0.3: U4.5@11.575,-18.483 ccw(c11.31,-18.219) 11.684,-18.219 ccw(c12.058,-18.219) U4.5@11.793,-18.483 ; U4.5 11.684,-16.676 R13.2 ; 11.684,-18.04 cw(c13.722,-18.04) R13.2@12.281,-16.599 ; 11.684,-17.994 cw(c13.792,-17.994) R13.2@12.302,-16.503 ; 11.684,-17.316 cw(c12.998,-17.316) R13.2@12.069,-16.387 ; 11.684,-17.27 cw(c13.068,-17.27) R13.2@12.089,-16.291 ; v1@20.231,-17.107 cw(c19.403,-17.935) 20.574,-17.935 cw(c21.745,-17.935) v1@20.917,-17.107 ; v1(20.574,-16.764) 20.574,-18.034 21.273,-18.732 U3.23
  BottomLayer w0.3: v6(11.938,-16.256) 12.446,-16.764 v1(20.574,-16.764) ; v1@20.231,-17.107 ccw(c19.403,-17.935) 19.403,-16.764 ccw(c19.403,-15.593) v1@20.231,-16.421
SHELD: 
SLRD: U2.38 U3.8 | length 41.1
  TopLayer w0.3: U3.8 30.797,-17.462 32.258,-16.002 38.862,-16.002 40.386,-17.526 40.386,-34.798 34.92,-40.264 U2.38
SLWR: U2.37 U3.9 | length 43.9
  TopLayer w0.3: U3.9 30.162,-16.828 31.75,-15.24 39.37,-15.24 41.148,-17.018 41.148,-35.052 35.42,-40.78 U2.37
SMEMR: P12.4 U2.111 | length 15.9
  TopLayer w0.3: P12.4 10.414,-72.136 14.986,-67.564 16.764,-67.564 18.92,-65.408 U2.111
SMEMW: P12.2 U2.109 | length 16.7
  TopLayer w0.3: P12.2 7.874,-72.39 16.628,-63.636 U2.109 U2.109@17.92,-63.106
SRDY: P1.29 U2.105 | length 21.1
  TopLayer w0.3: P1.29 0,-68.072 4.064,-68.072 11.8,-60.336 U2.105
USB5V: C13.1 C15.1 R6.2 U1.3 USB.1 | length 23.3
  TopLayer w0.8: U1.3 9.802,-5.776 R6.2 12.954,-10.602 14.798,-12.446 ; C15.1 14.29,-12.954 14.798,-12.446 ; USB.1 19.558,-12.446 14.798,-12.446
USB+: U3.15 USB.3 | length 13.9
  TopLayer w0.3: USB.3 26.352,-8.572 U3.15
USB-: U3.16 USB.2 | length 11.1
  TopLayer w0.3: USB.2 25.717,-10.477 U3.16
USBGND: Ind1.1 USB.4 | length 9.5
  BottomLayer w0.8: Ind1.1@13.97,-9.906 16.002,-9.906 18.796,-7.112 USB.4
VCC3.3: C1.2 C2.2 C3.2 C4.2 C6.2 C7.2 C8.2 C9.2 C12.1 C14.1 C22.2 C23.2 Ind2.1 JTAG.4 P1.2 P11.1 P11.21 P12.7 P12.34 R6_1.1 R7.2 R8.2 R10.2 R12.1 R13.1 R16.2 R18.2 U1.2 U1.4 U2.9 U2.19 U2.25 U2.46 U2.56 U2.64 U2.82 U2.90 U2.100 U2.116 U2.126 U2.136 U3.6 U3.18 U3.24 U3.34 U3.39 U3.50 U4.8 U5.4 | length 439.3
  TopLayer w0.3: R12.1@7.743,-16.503 cw(c7.425,-16.821) 7.874,-16.821 ; U4.8@7.765,-18.483 ccw(c7.5,-18.219) 7.874,-18.219 ccw(c8.248,-18.219) U4.8@7.983,-18.483 ; U4.8 R12.1@7.874,-16.422 ; 7.874,-17.381 cw(c9.115,-17.381) R12.1@8.238,-16.503 ; P12.7 16.764,-76.2 16.764,-72.644 21.42,-67.988 21.42,-61.638 22.606,-60.452 22.606,-58.42 ; U2.100 18.212,-57.836 18.796,-58.42 21.844,-58.42 ; U2.90 v3@21.92,-52.836 ; U2.82 17.966,-48.836 18.796,-48.006 v1(21.92,-48.006) ; 19.558,-25.4 19.558,-23.368 20.637,-22.288 U3.24 ; 20.376,-52.836 ccw(c20.376,-51.11) v3@21.597,-52.331 ; 21.1,-52.836 ccw(c21.1,-51.834) v3@21.809,-52.543 ; U3.34 21.273,-25.4 ; v1@21.577,-48.349 ccw(c20.749,-49.177) 20.749,-48.006 ccw(c20.749,-46.835) 21.577,-47.663 ccw(c20.749,-46.835) 21.92,-46.835 ccw(c23.091,-46.835) v1@22.263,-47.663 ; v1@21.92,-47.93 U2.64 ; U3.39 U3.18 ; 25.92,-47.486 U2.56 ; 25.92,-47.047 ccw(c26.867,-47.047) 26.197,-47.717 ; 25.92,-46.323 ccw(c27.591,-46.323) 26.409,-47.505 ; U2.126 v3@26.42,-58.424 ; 26.42,-59.868 cw(c28.118,-59.868) v3@26.917,-58.667 ; 26.42,-59.144 cw(c27.394,-59.144) v3@26.705,-58.455 ; 30.92,-47.684 U2.46 ; U2.136 31.42,-58.218 ; U3.50 v1@31.432,-25.4 ; 31.432,-27.951 cw(c34.555,-27.951) v1@32.347,-25.743 ; 31.432,-27.226 cw(c33.83,-27.226) v1@32.135,-25.531 ; 31.432,-26.502 cw(c33.106,-26.502) v1@31.923,-25.319 ; 31.432,-25.778 cw(c32.382,-25.778) v1@31.711,-25.107 ; v1@31.661,-25.057 ccw(c30.68,-24.076) 32.067,-24.076 ; v2@31.802,-57.836 50.47,-57.836 51.816,-59.182 P11.21 ; v4@31.802,-52.836 U2.19 ; 31.802,-49.836 U2.25 ; v1@32.067,-25.4 U3.6 ; 32.067,-24.382 ccw(c33.022,-24.382) v1@32.347,-25.057
  TopLayer w0.4: P1.2 1.27,-30.48 3.81,-27.94 3.81,-24.076 5.122,-22.764 ccw(c4.61,-22.252) 5.334,-22.252 ccw(c6.058,-22.252) R10.2@5.546,-22.764 ; R10.2 5.334,-18.796 7.874,-16.256 7.874,-14.732 8.382,-14.224 13.208,-14.224 13.804,-14.82 R13.1 ; v8(6.096,-14.732) 7.62,-16.256 R12.1 ; 7.28,-16.85 cw(c7.99,-17.56) R12.1@7.99,-16.556 ; R12.1@7.56,-16.57 ccw(c7.246,-16.256) R12.1@7.69,-16.256 ; 7.874,-15.252 ccw(c8.994,-15.252) R12.1@8.202,-16.044 ; R13.1@13.592,-16.044 ccw(c13.08,-15.532) 13.804,-15.532 ccw(c14.528,-15.532) R13.1@14.016,-16.044
  TopLayer w0.5: v1(18.288,-25.4) v1@32.067,-25.4 ; v1@18.56,-25.672 cw(c19.217,-26.329) 19.217,-25.4 cw(c19.217,-24.471) v1@18.56,-25.128 ; v1@31.732,-25.672 ccw(c31.075,-26.329) 31.075,-25.4 ccw(c31.075,-24.471) v1@31.732,-25.128
  TopLayer w0.6: v1@21.683,-48.243 cw(c21.111,-48.815) 21.92,-48.815 cw(c22.729,-48.815) v1@22.157,-48.243 ; v3@21.703,-55.767 cw(c21.178,-56.292) 21.92,-56.292 ; v3@21.703,-55.485 ccw(c21.178,-54.96) 21.92,-54.96 ; v3@21.703,-52.719 cw(c21.178,-53.244) 21.92,-53.244 ; v3@21.703,-52.437 ccw(c21.178,-51.912) 21.92,-51.912 ; v1(21.92,-48.006) 21.92,-58.344 21.844,-58.42 31.218,-58.42 31.802,-57.836 31.802,-48.566 30.92,-47.684 26.118,-47.684 ; 27.547,-47.684 cw(c27.547,-48.399) v3@28.053,-47.893 ; v3@28.335,-47.893 cw(c28.841,-48.399) 28.841,-47.684 ; 31.802,-55.072 cw(c32.974,-55.072) v3@32.145,-54.243 ; 31.802,-53.132 ccw(c32.974,-53.132) v3@32.145,-53.961 ; 31.802,-52.024 cw(c32.974,-52.024) v3@32.145,-51.195 ; 31.802,-50.084 ccw(c32.974,-50.084) v3@32.145,-50.913 ; R8.2 R7.2@38.862,-5.842
  TopLayer w0.8: C12.1@5.842,-12.954 5.842,-14.478 v8(6.096,-14.732) ; C12.1@5.93,-12.612 6.604,-11.938 U1.4 ; C12.1@6.08,-12.954 cw(c7.268,-12.954) 6.428,-12.114 ; U1.4@6.127,0.845 cw(c4.974,-0.308) 6.604,-0.308 cw(c8.234,-0.308) U1.4@7.081,0.845
  BottomLayer w0.3: v1@31.661,-25.057 ccw(c30.833,-24.229) 32.004,-24.229 ccw(c33.175,-24.229) v1@32.347,-25.057 ; Ind2.1@31.794,-24.377 cw(c31.289,-24.883) v1@32.004,-24.883 ; v1(32.004,-25.4) 32.004,-24.218 Ind2.1 ; v1@32.004,-25.067 cw(c32.979,-25.067) Ind2.1@32.289,-24.377 ; 48.68,-20.828 54.356,-20.828 JTAG.4
  BottomLayer w0.4: v4(32.004,-52.578) 38.1,-52.578 42.672,-48.006 U5.4
  BottomLayer w0.6: v1(32.004,-25.4) 35.306,-25.4 41.402,-19.304 41.402,-11.43 39.878,-9.906 v3(38.862,-9.906) ; v1@32.241,-25.637 cw(c32.813,-26.209) 32.813,-25.4 cw(c32.813,-24.591) v1@32.241,-25.163
  BottomLayer w0.8: R6_1.1@5.588,-3.998 5.588,-3.048 v4(6.604,-2.032) ; v8(6.096,-14.732) 6.096,-19.812 10.668,-24.384 10.668,-25.4 v1(18.288,-25.4) ; 13.851,-25.4 ccw(c13.851,-23.895) C22.2@14.915,-24.959 ; C22.2@15.057,-24.959 ccw(c16.121,-23.895) 16.121,-25.4 ; 16.899,-25.4 ccw(c16.899,-23.895) C23.2@17.963,-24.959 ; v2@32.004,-57.658 33.528,-57.658 48.514,-72.644 P12.34 ; U5.4 44.022,-46.91 50.292,-40.64 50.292,-30.734 48.68,-29.122 R18.2 ; 50.292,-33.782 P11.1
  BottomLayer w1: 10.668,-25.4 13.208,-27.94 13.208,-41.402 19.812,-48.006 v1(21.92,-48.006) ; 20.988,-48.006 cw(c20.988,-49.74) C1.2@22.214,-48.514
  other v2: 31.75,-57.658
  other v3: 26.67,-58.42 29.718,-58.42 21.844,-55.626 32.004,-54.102 21.844,-52.578 32.004,-51.054 28.194,-47.752
WAKEUP: C18.1 R7.1 U3.51 WAKE.2 | length 58
  TopLayer w0.3: U3.51 32.067,-27.877 v1(33.02,-26.924) ; v1@32.535,-26.924 cw(c31.364,-26.924) 32.192,-27.752 cw(c33.02,-28.58) v1@33.02,-27.409
  TopLayer w0.8: R7.1 39.536,-3.556 43.053,-3.556 44.45,-4.953 WAKE.2@44.45,1.397 ; R7.1@38.933,-4.251 cw(c40.61,-5.928) 40.61,-3.556 ; C18.1@41.146,-3.812 ccw(c40.528,-4.43) 40.528,-3.556 ccw(c40.528,-2.682) C18.1@41.146,-3.3 ; C18.1@41.658,-3.812 cw(c42.276,-4.43) 42.276,-3.556 cw(c42.276,-2.682) C18.1@41.658,-3.3 ; WAKE.2@43.961,-4.953 ccw(c42.78,-4.953) 43.615,-4.118 ccw(c44.45,-3.283) WAKE.2@44.45,-4.464 ; WAKE.2@44.104,-4.607 ccw(c43.269,-3.772) 44.45,-3.772 ccw(c45.631,-3.772) WAKE.2@44.796,-4.607 ; WAKE.2@44.104,1.051 cw(c43.269,0.216) 44.45,0.216 cw(c45.631,0.216) WAKE.2@44.796,1.051
  BottomLayer w0.3: v1(33.02,-26.924) 35.306,-26.924 42.418,-19.812 42.418,-7.07 ; v1@33.363,-27.267 cw(c34.191,-28.095) 34.191,-26.924 cw(c34.191,-25.753) v1@33.363,-26.581 ; 42.376,-7.027 WAKE.2@44.45,-4.953
pads on no net: 33V.1 JTAG.6 JTAG.7 JTAG.8 R6_1.2 U4.7 U5.1
copper on no net: | length 2.1
  BottomLayer w0.8: 1.016,-4.572 3.114,-4.572

## Polygon pours and split planes (outlines as drawn)
DGND on TopLayer "TopLayer-No Net" (solid, remove dead copper): -2.794,2.794 57.15,2.794 57.15,-78.74 -2.794,-78.74 -2.794,2.794
DGND on BottomLayer "TopLayer-No Net" (solid, remove dead copper): -2.794,2.794 57.15,2.794 57.15,-78.74 -2.794,-78.74 -2.794,2.794

## Keep-outs
KeepOutLayer:
  the board outline again, w0.203

## Other copper
TopLayer:
  rectangle net DGND: 22.606,-15.494 25.146,-11.43
  rectangle net VCC3.3: 3.048,-1.524 10.16,2.286

## Silkscreen, mask and mechanical layers (free items; w line width, h text height)
TopOverlay:
  lines w0.254: 2.54,-32.512 8.636,-32.512 ; 2.694,-73.719 6.291,-73.719 ; 51.816,-32.512 46.228,-32.512 46.228,-67.056 ; 52.07,-73.152 50.038,-73.152 48.26,-71.374 48.26,-69.088 46.228,-67.056 ; 6.291,-73.719 6.35,-73.66 ; 6.291,-73.719 6.35,-73.66 ; 6.35,-73.66 6.35,-72.898 6.35,-69.342 8.636,-67.056 ; 8.636,-67.056 8.636,-32.512 ; 8.636,-67.056 46.228,-67.056 ; 8.636,-32.512 8.636,-32.512
  text "76" at 2.54,-11.938 h1
  text "75" at 2.54,-18.034 h1
  text "74" at 2.54,-23.114 h1
  text "73" at 2.286,-28.702 h1
  text "GND" at 2.794,-34.29 h1
  text "VCC" at 5.842,-34.29 h1
  text "VCC" at 46.482,-34.29 h1
  text "GND" at 49.276,-34.29 h1
  text "73" at 3.556,-36.83 h1
  text "74" at 5.842,-36.83 h1
  text "31" at 46.99,-36.83 h1
  text "32" at 49.784,-36.83 h1
  text "REV2.1" at 22.606,-37.084 h1.91
  text "75" at 3.302,-39.37 h1
  text "76" at 5.842,-39.37 h1
  text "29" at 46.736,-39.37 h1
  text "30" at 49.53,-39.37 h1
  text "77" at 3.302,-41.91 h1
  text "78" at 5.842,-41.91 h1
  text "28" at 49.53,-41.91 h1
  text "27" at 46.99,-42.164 h1
  text "79" at 3.048,-44.45 h1
  text "80" at 5.842,-44.45 h1
  text "24" at 49.276,-44.45 h1
  text "23" at 46.736,-44.704 h1
  text "81" at 3.048,-46.99 h1
  text "84" at 5.588,-46.99 h1
  text "21" at 46.736,-46.99 h1
  text "22" at 49.276,-46.99 h1
  text "85" at 3.048,-49.53 h1
  text "86" at 5.842,-49.53 h1
  text "GND" at 46.736,-49.53 h1
  text "20" at 49.784,-49.53 h1
  text "15" at 46.736,-51.816 h1
  text "16" at 49.53,-51.816 h1
  text "87" at 3.302,-52.07 h1
  text "88" at 5.588,-52.07 h1
  text "13" at 46.736,-54.356 h1
  text "14" at 49.53,-54.356 h1
  text "89" at 3.302,-54.61 h1
  text "91" at 5.842,-54.61 h1
  text "11" at 46.99,-56.896 h1
  text "93" at 3.302,-57.15 h1
  text "94" at 5.588,-57.15 h1
  text "12" at 49.53,-57.15 h1
  text "95" at 3.048,-59.436 h1
  text "96" at 5.334,-59.436 h1
  text "9" at 47.244,-59.436 h1
  text "10" at 49.53,-59.436 h1
  text "97" at 3.048,-61.976 h1
  text "98" at 5.588,-61.976 h1
  text "7" at 47.498,-61.976 h1
  text "8" at 49.784,-61.976 h1
  text "5" at 47.498,-64.516 h1
  text "6" at 49.784,-64.516 h1
  text "101" at 2.794,-64.77 h1
  text "102" at 5.588,-64.77 h1
  text "3" at 47.498,-66.548 h1
  text "4" at 49.784,-66.802 h1
  text "103" at 2.794,-67.31 h1
  text "104" at 5.588,-67.31 h1
  text "106" at 4.826,-67.818 h1 r270
  text "105" at 3.048,-68.072 h1 r270
  text "1" at 48.768,-68.326 h1
  text "2" at 50.292,-68.326 h1
  text "111" at 11.176,-69.596 h1 r90
  text "131" at 33.528,-69.596 h1 r90
  text "141" at 43.688,-69.596 h1 r90
  text "113" at 13.462,-69.85 h1 r90
  text "115" at 15.748,-69.85 h1 r90
  text "117" at 18.542,-69.85 h1 r90
  text "119" at 20.828,-69.85 h1 r90
  text "121" at 23.622,-69.85 h1 r90
  text "125" at 28.448,-69.85 h1 r90
  text "129" at 30.988,-69.85 h1 r90
  text "133" at 36.068,-69.85 h1 r90
  text "137" at 38.608,-69.85 h1 r90
  text "139" at 41.402,-69.85 h1 r90
  text "143" at 45.466,-69.85 h1 r90
  text "123" at 25.654,-70.104 h1 r90
  text "VCC" at 46.736,-70.104 h1 r90
  text "109" at 9.398,-70.358 h1 r90
  text "108" at 4.572,-70.866 h1 r270
  text "107" at 2.794,-71.12 h1 r270
  text "GND" at 50.546,-72.39 h1 r90
  text "110" at 8.382,-72.898 h1 r90
  text "112" at 10.922,-72.898 h1 r90
  text "114" at 13.208,-72.898 h1 r90
  text "124" at 25.908,-72.898 h1 r90
  text "132" at 33.528,-72.898 h1 r90
  text "134" at 36.068,-72.898 h1 r90
  text "138" at 38.608,-72.898 h1 r90
  text "140" at 41.402,-72.898 h1 r90
  text "142" at 43.688,-72.898 h1 r90
  text "116" at 15.748,-73.152 h1 r90
  text "118" at 18.542,-73.152 h1 r90
  text "120" at 20.828,-73.152 h1 r90
  text "122" at 23.622,-73.152 h1 r90
  text "127" at 28.448,-73.152 h1 r90
  text "130" at 30.988,-73.152 h1 r90
  text "144" at 45.72,-73.152 h1 r90
  text "GND" at 47.244,-73.152 h1 r90
BottomOverlay:
  text "WWW.AIMLAB.CN" at 14.224,-69.088 h2

## Dimensions
-15.494,-93.726 to -2.794,-78.74 on Mechanical4
-21.082,-88.138 to -2.794,-78.74 on Mechanical4

## Text inside footprints (layer, text, board x,y; h text height)
JTAG: TopOverlay "10" at 55.118,-28.702 h1.27 r270; TopOverlay "9" at 53.086,-28.702 h1.27 r270; TopOverlay "1" at 52.324,-13.208 h1.27 r270; TopOverlay "2" at 55.372,-12.954 h1.27 r270
P1: TopOverlay "32" at 0.762,-73.406 h1.27 r270; TopOverlay "31" at -1.778,-73.152 h1.27 r270; TopOverlay "1" at -1.778,-30.734 h1.27 r270; TopOverlay "2" at 1.27,-30.734 h1.27 r270
P11: TopOverlay "32" at 55.118,-73.406 h1.27 r270; TopOverlay "31" at 52.578,-73.406 h1.27 r270; TopOverlay "1" at 52.324,-30.988 h1.27 r270; TopOverlay "2" at 55.118,-30.734 h1.27 r270
P12: TopOverlay "34" at 50.038,-75.438 h1.27; TopOverlay "33" at 50.038,-77.978 h1.27; TopOverlay "1" at 4.826,-77.978 h1.27; TopOverlay "2" at 4.826,-75.438 h1.27